# Altium PCB MADI_STM32G4_PCB_L4.PcbDoc (part 1 of 3)
Units mm, origin at the board's own origin, x right, y up, seen from the top; angles counter-clockwise.
Board outline 30 x 21.59 mm, 4 copper layers (L1, L2 (GND), L3 (GND), L4), stack 1.525 mm thick; 52 components, 52 nets, 268 pads, 180 vias.
Unrouted connection lines stored in the file: 135.
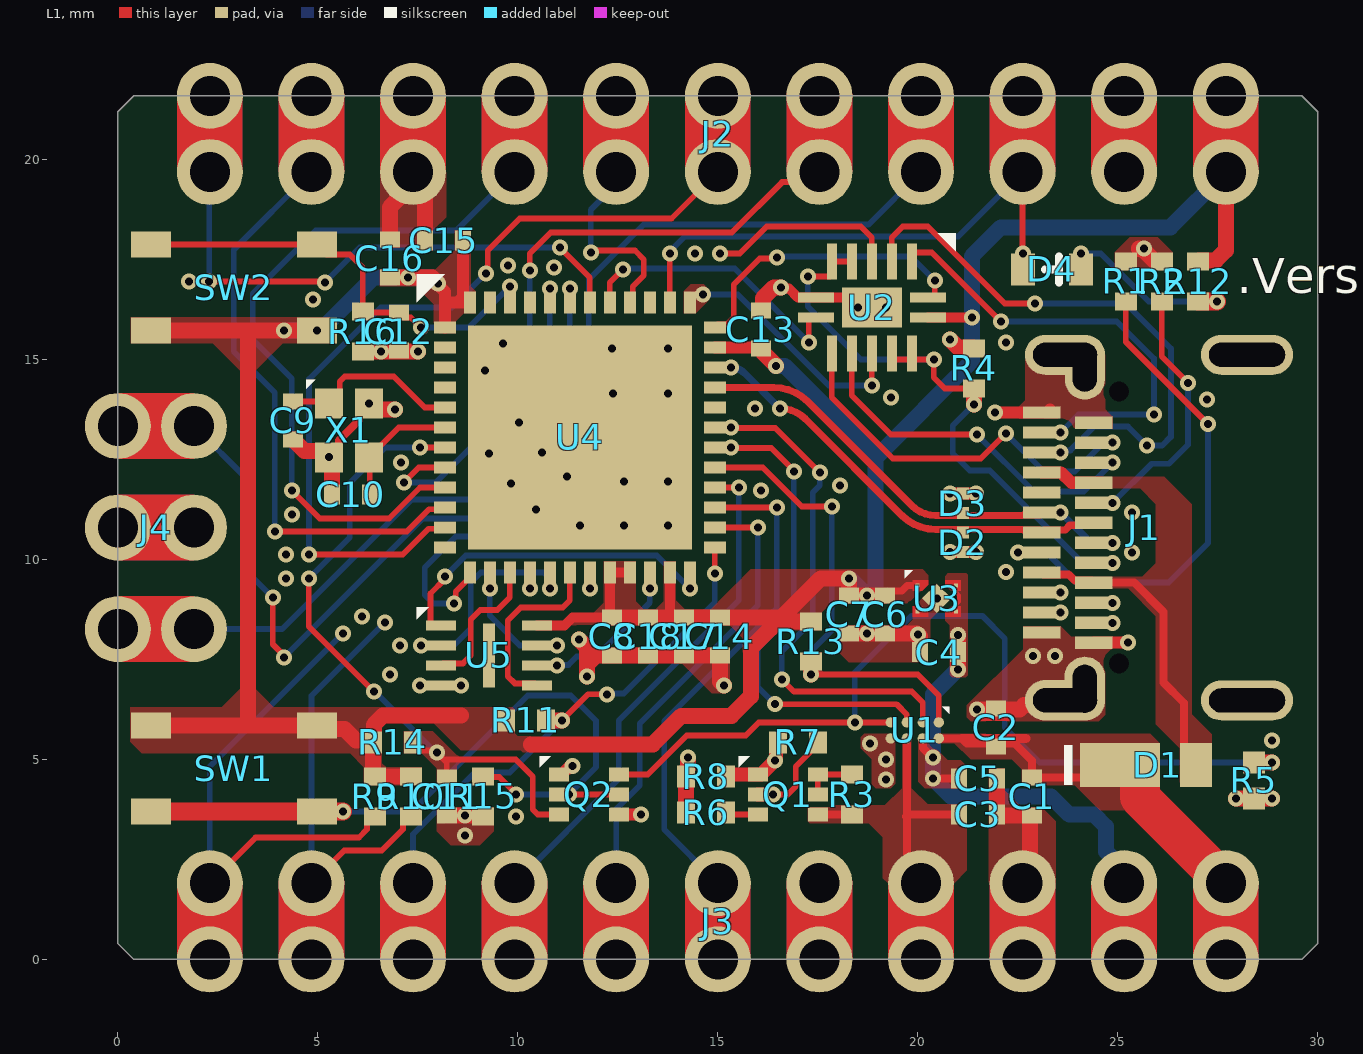
[diagram p0: L1 view]
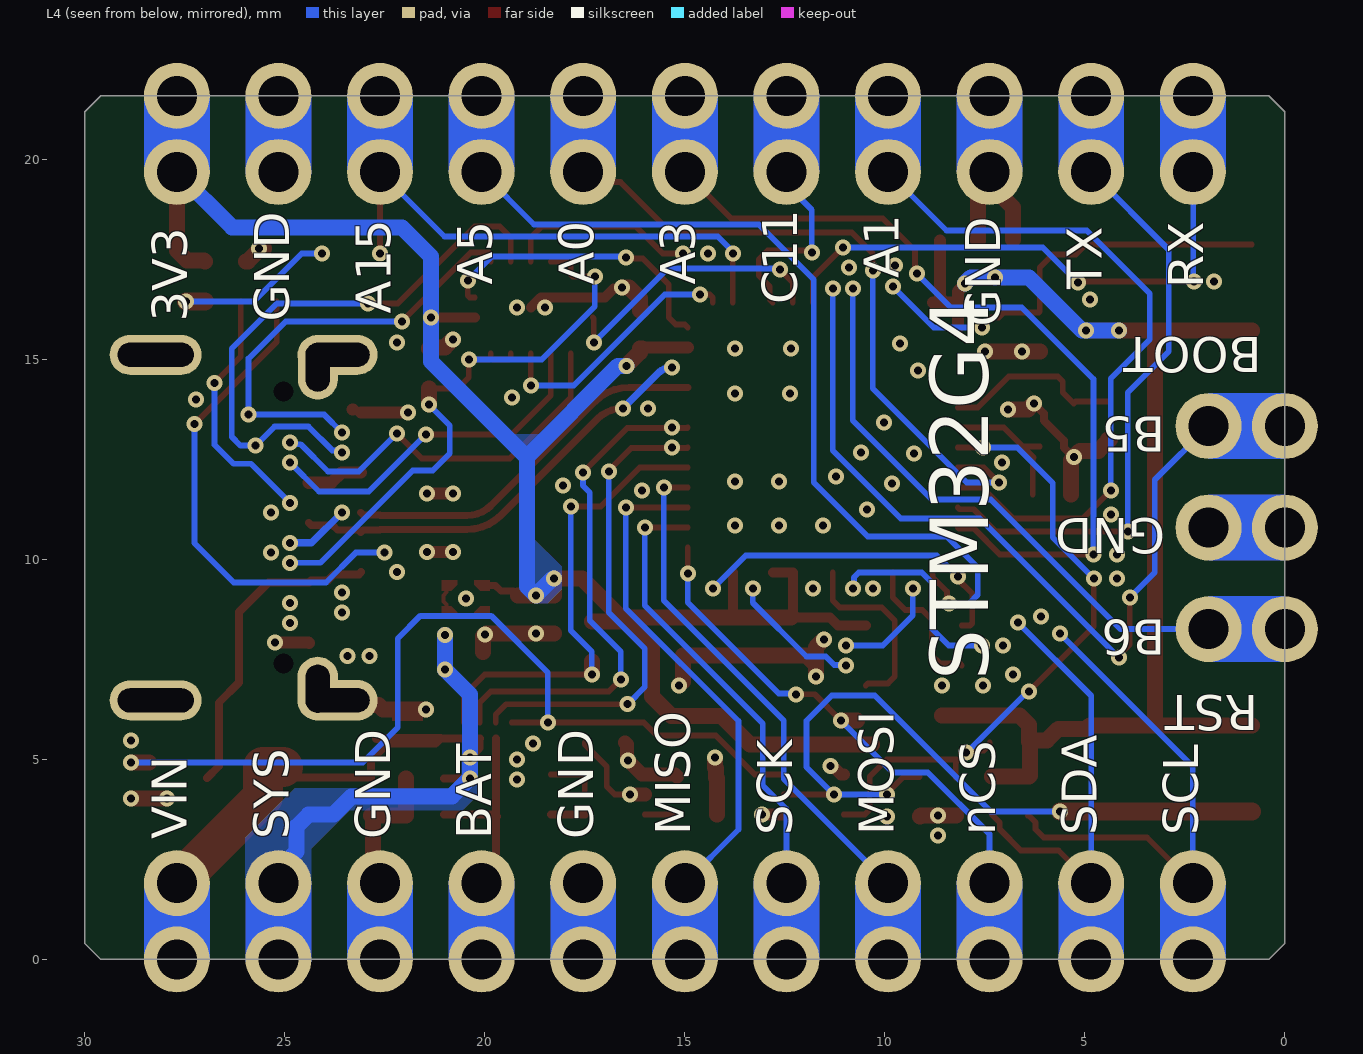
[diagram p1: L4 view, seen from below]
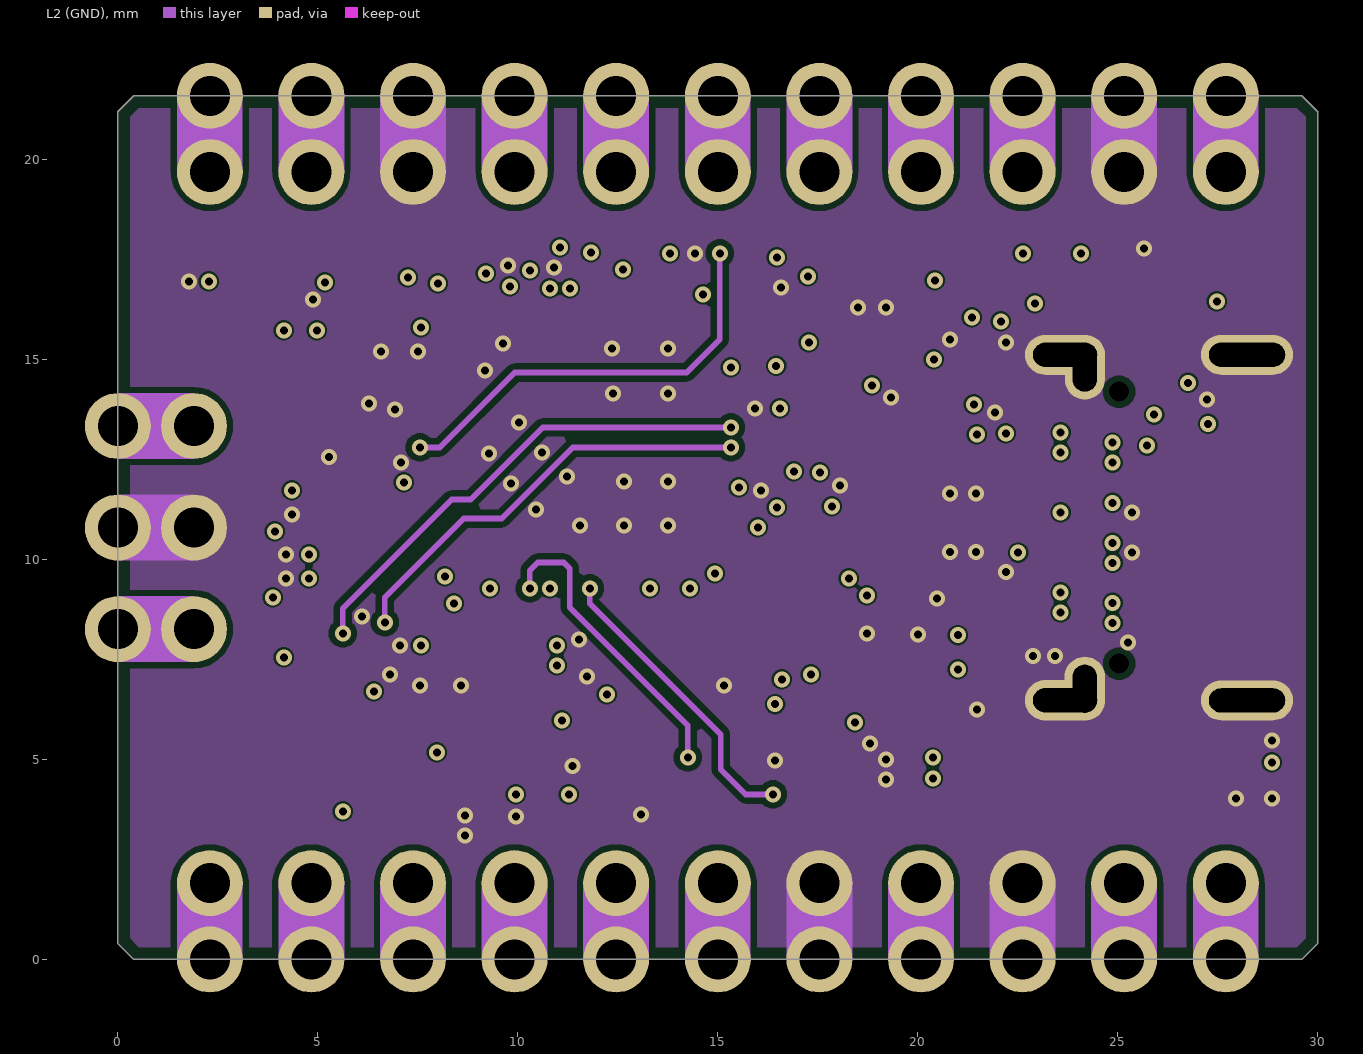
[diagram p2: L2 (GND)]
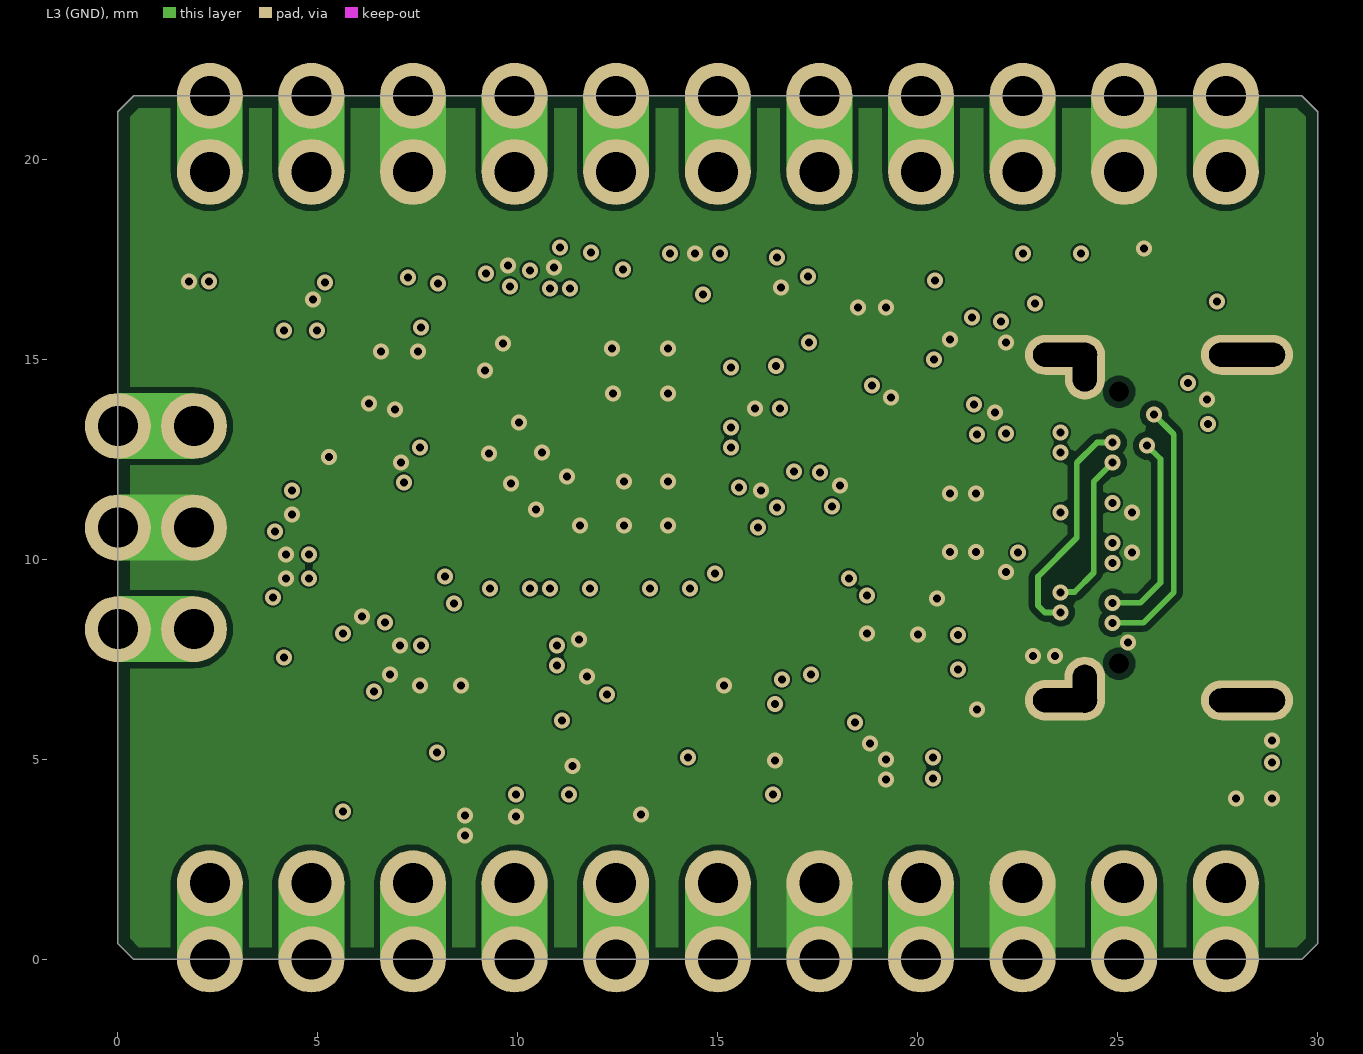
[diagram p3: L3 (GND)]
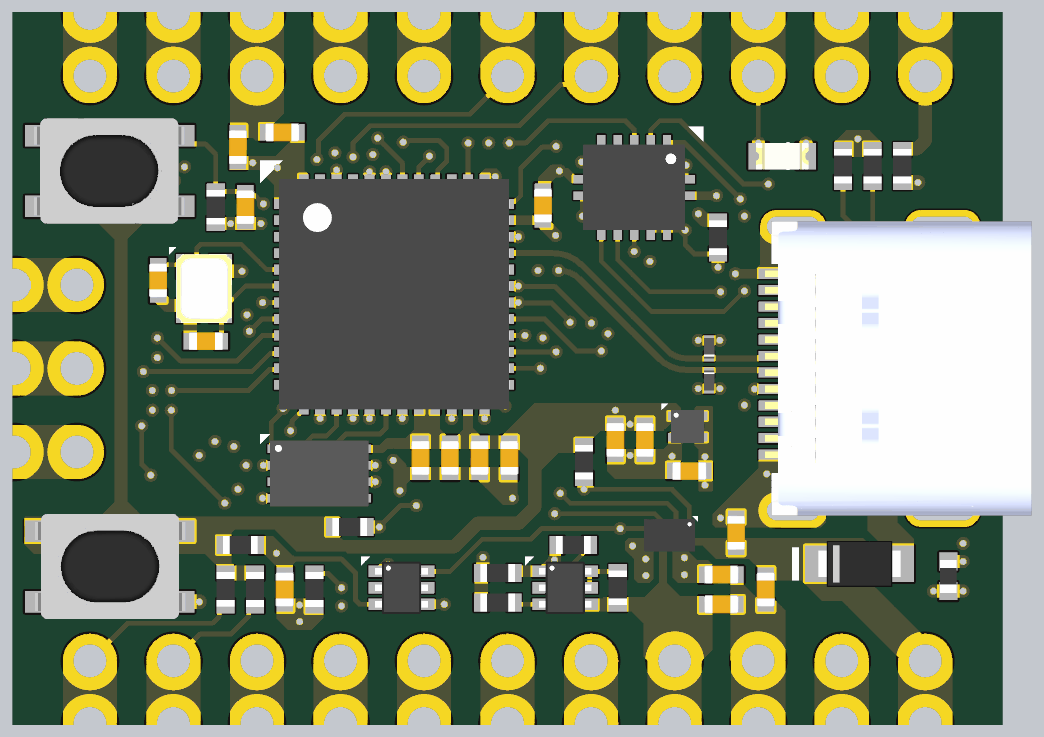
[diagram p5: 3D render of the assembled board from above, using the file's embedded part models]

## Layer stack, top to bottom
Top Solder: solder mask 0.02, Solder Resist, Dk 4.2
L1: signal copper 0.0175
Dielectric 1: prepreg 0.11, ?, Dk 4.5
L2 (GND): signal copper 0.035
Dielectric 2: core 1.2, FR-4, Dk 4.5
L3 (GND): signal copper 0.035
Dielectric 3: prepreg 0.11, ?, Dk 4.5
L4: signal copper 0.0175
Bottom Solder: solder mask 0.02, Solder Resist, Dk 4.2

## Board outline
0,0.4 0.4,0 29.6,0 30,0.4 30,21.19 29.6,21.59 0.4,21.59 0,21.19

## Design rules (kind name [scope] priority, off if disabled: settings)
AcuteAngle [All] p1: minimum=4.49000000000000E+0001 checktracksonly=FALSE
BoardOutlineClearance BoardOutlineClearance_Silk [OnLayer('Top Overlay') or OnLayer('Bottom Overlay')] p1: gap=0 ignorepadtopadclearanceinfootprint=FALSE
BoardOutlineClearance BoardOutlineClearance_EdgeComponents [InComponent('J4') or InComponent('J3') or InComponent('J2')] p2: gap=0 ignorepadtopadclearanceinfootprint=FALSE
BoardOutlineClearance BoardOutlineClearance_Text [IsText] p3: gap=0 ignorepadtopadclearanceinfootprint=FALSE
BoardOutlineClearance [All] p4: gap=0.3 ignorepadtopadclearanceinfootprint=FALSE
Clearance Clearance_Fiducials [InComponentClass('Fiducial') vs InComponentClass('Fiducial')] p1: gap=0 ignorepadtopadclearanceinfootprint=FALSE
Clearance "Clearance_Track and Track" [IsTrack vs IsTrack] p2: gap=0.15 ignorepadtopadclearanceinfootprint=FALSE
Clearance Clearance_NPTH [(InPadClass('NPTH'))] p3: gap=0.2 ignorepadtopadclearanceinfootprint=FALSE
Clearance Clearance_ThruPin [IsThruPin and Not InAnyComponent] p4: gap=0.25 ignorepadtopadclearanceinfootprint=FALSE
Clearance "Clearance_Poly to All" [IsRegion and (not InAnyComponent)] p5: gap=0.15 ignorepadtopadclearanceinfootprint=TRUE
Clearance [All] p6: gap=0.1 ignorepadtopadclearanceinfootprint=FALSE
ComponentClearance ComponentClearance_SW1_SW2 [InComponent('SW1') or InComponent('SW2') vs InComponent('J2') or InComponent('J3')] p1: gap=0 collisioncheckmode=3 verticalgap=0 showdistances=FALSE
ComponentClearance ComponentClearance_U4 [InComponent('U4') vs InComponent('U4')] p2: gap=0 collisioncheckmode=3 verticalgap=0 showdistances=FALSE
ComponentClearance [All] p3: gap=0.1 collisioncheckmode=3 verticalgap=0 showdistances=FALSE
DiffPairsRouting [All] p1: maxlimit=0.17 minlimit=0.1 mostfreqgap=0.17 toplayer_mingap=0.17 toplayer_minwidth=0.18 toplayer_maxwidth=0.18 toplayer_prefwidth=0.18 bottomlayer_mingap=0.17 bottomlayer_minwidth=0.18 bottomlayer_maxwidth=0.18 bottomlayer_prefwidth=0.18 impedanceprofiledriven=TRUE impedanceprofileid={6465BEDB-63ED-48EF-AFED-AA02275A4435} impedanceprofilevalue=90.000000 maxuncoupledlength=12.7
HoleSize [All] p1: absolutevalues=TRUE maxlimit=6.5 minlimit=0.2 maxpercent=80.000 minpercent=20.000
HoleToHoleClearance HoleToHoleClearance_J1 [InComponent('J1') vs InComponent('J1')] p1: gap=0 allowstackedmicrovias=TRUE
HoleToHoleClearance HoleToHoleClearance_1 [All] p2: gap=0.2 allowstackedmicrovias=TRUE
Length [InNetClass('Xtal')] p1: maxlimit=2540 minlimit=0
MinimumAnnularRing MinimumAnnularRing_ThermalPadVias [IsVia and InAnyComponent] p1: minimumring=0.1
MinimumAnnularRing [All] p2: minimumring=0.1
MinimumSolderMaskSliver [All] p1: minsoldermaskwidth=0.03
PlaneClearance [All] p1: clearance=0.2
PlaneConnect "PlaneConnect_GND to PAD" [(InNet('GND') and IsPad)] p1: planeconnectstyle=Relief reliefexpansion=0.3 reliefentries=4 reliefconductorwidth=0.5 reliefairgap=0.2
PlaneConnect [All] p2: planeconnectstyle=Direct reliefexpansion=0.508 reliefentries=4 reliefconductorwidth=0.254 reliefairgap=0.254
PolygonConnect [All] p1: connectstyle=Direct reliefconductorwidth=0.254 reliefentries=4 polygonreliefangle="90 Angle" airgapwidth=0.254
RoutingVias ThermalPadVias [IsVia and InAnyComponent] p1: holewidth=0.2 width=0.45 viastyle="Through Hole" minholewidth=0.2 minwidth=0.4 maxholewidth=0.25 maxwidth=0.5
RoutingVias [All] p2: holewidth=0.3 width=0.6 viastyle="Through Hole" minholewidth=0.2 minwidth=0.4 maxholewidth=0.4 maxwidth=0.8
SMDEntry [All] p1: side=TRUE corner=TRUE anyangle=TRUE
SilkToSilkClearance [All] p1: silktosilkclearance=0
SilkToSolderMaskClearance [IsPad] p1: minsilkscreentomaskgap=0 clearancetoexposedcopper=TRUE
SolderMaskExpansion [All] p1: expansion=0.07 istentingtop=FALSE useseparateexpansions=TRUE expansionbottom=0.07 istentingbottom=FALSE
Width Width_Power [InNet('+*') or InNet('GND')] p1: maxlimit=2.5 minlimit=0.1 preferedwidth=0.4
Width [All] p2: maxlimit=2.5 minlimit=0.1 preferedwidth=0.146 minimp=50.000000 maximp=50.000000 favimp=50.000000
21 further rules are at their usual default settings.

## Classes and differential pairs
differential pair class DIFF90: USB_D
differential pair USB_D: +USB_D_P -USB_D_N

## Components (designator, comment, footprint, x,y, rotation, side; value= is the part's Value field where it differs from the comment)
C1 "4.7uF" CAPC1005X06N 22.85,4.075 r90 top
C2 "100nF" CAPC1005X06N 21.95,5.8 r270 top
C3 "1uF" CAPC1005X06N 21.5,3.625 r180 top
C4 "4.7uF" CAPC1005X06N 20.525,7.68 r0 top
C5 "100nF" CAPC1005X06N 21.5,4.525 r180 top
C6 "100nF" CAPC1005X06N 19.175,8.625 r90 top
C7 "1uF" CAPC1005X06N 18.275,8.625 r90 top
C8 "1uF" CAPC1005X06N 12.35,8.075 r90 top
C9 "8pF" CAPC1005X06N 4.375,13.475 r270 top
C10 "8pF" CAPC1005X06N 5.825,11.625 r180 top
C11 "1uF" CAPC1005X06N 8.225,4.075 r90 top
C12 "100nF" CAPC1005X06N 7.025,15.7 r90 top
C13 "100nF" CAPC1005X06N 16.075,15.75 r270 top
C14 "100nF" CAPC1005X06N 15.05,8.075 r90 top
C15 "100nF" CAPC1005X06N 8.15,17.975 r0 top
C16 "100nF" CAPC1005X06N 6.8,17.525 r270 top
C17 "100nF" CAPC1005X06N 14.15,8.075 r90 top
C18 "100nF" CAPC1005X06N 13.25,8.075 r90 top
D1 "CUHS20F30,H3F" US2H-DIODE 25.7,4.855 r0 top
D2 "TPESD0201G05V" DIOC0603X03N 21.125,10.43 r270 top
D3 "TPESD0201G05V" DIOC0603X03N 21.125,11.405 r90 top
D4 "YLWGREEN" LDIOC1608X08N 23.35,17.25 r180 top
J1 "TYPEC-324G-BCP24" KUSBX-SMT3-CS-BTR_KYC 26.881,10.795 r90 top locked
J2 "Double_Header_1x11_2.54" 1x11_DOUBLE_HEADER_2.54 15,21.59 r180 top
J3 "Double_Header_1x11_2.54" 1x11_DOUBLE_HEADER_2.54 15,1.905 r180 top
J4 "Double_Header_1x3_2.54" 1x3_DOUBLE_HEADER_2.54 1.905,10.795 r90 top
Q1 "EM6M2T2R" SOTFL50P160X55-6N 16.75,4.125 r0 top
Q2 "EM6K7T2R" SOTFL50P160X55-6N 11.775,4.125 r0 top
R1 "5.1K" RESC1005X04N 25.2,16.95 r270 top
R2 "5.1K" RESC1005X04N 26.1,16.95 r270 top
R3 "10K" RESC1005X04N 18.35,4.125 r270 top
R4 "10K" RESC1005X04N 21.4,14.775 r270 top
R5 "10K NTC" NTC1005X05N 28.4,4.475 r90 top value=10kR
R6 "360K" RESC1005X04N 14.7,3.675 r0 top value=360kR
R7 "10K" RESC1005X04N 17,5.425 r0 top
R8 "56K" RESC1005X04N 14.7,4.575 r180 top
R9 "10K" RESC1005X04N 6.428,4.076 r90 top
R10 "10K" RESC1005X04N 7.325,4.075 r90 top
R11 "10K" RESC1005X04N 10.2,5.975 r180 top
R12 "510R" RESC1005X04N 27,16.95 r90 top
R13 "10K" RESC1005X04N 17.325,7.95 r270 top
R14 "10K" RESC1005X04N 6.875,5.425 r180 top
R15 "10K" RESC1005X04N 9.125,4.075 r90 top
R16 "10K" RESC1005X04N 6.125,15.7 r90 top
SW1 "PTS810SJM250SMTRLFS" PTS810 2.9,4.775 r180 top
SW2 "PTS810SJM250SMTRLFS" PTS810 2.9,16.8 r0 top
U1 "BQ25180YBGR" BGA8C40P2X4_100X155X50_YBG0008 19.925,5.725 r270 top
U2 "74LVC4066BQ,115" QFN50P250X300X100_HS-15N 18.85,16.3 r270 top
U3 "NCP167BMX330TBG" NCP167 20.475,9.025 r0 top
U4 "STM32G473CEU6" QFN50P700X700X60_HS-49N 11.55,13.05 r0 top locked
U5 "MX25R1635FZUIL0" USON8_3X2 9.275,7.6 r0 top
X1 "32 MHz" XT2016_ECS 5.775,13.225 r270 top

## Footprints (in the part's own frame and the unit in brackets; to place one, negate y for a bottom-side part, rotate by r counter-clockwise, add the part's x,y. Pads: shape width x height; smd on the part's side, far side on the other; paste and mask are expansions set on the pad)
1x3_DOUBLE_HEADER_2.54 [mm]
  round 1.65 hole 1: 1(-2.54,0) 1(-2.54,1.905) 2(0,1.905) 2(0,0) 3(2.54,0) 3(2.54,1.905)
  Multi-Layer region: 1.717,0 3.365,0 3.365,1.905 1.717,1.905
  Multi-Layer region: -0.823,0 0.825,0 0.825,1.905 -0.823,1.905
  Multi-Layer region: -3.363,0 -1.715,0 -1.715,1.905 -3.363,1.905
1x11_DOUBLE_HEADER_2.54 [mm]
  round 1.65 hole 1: 1(-12.7,0) 1(-12.7,1.905) 2(-10.16,0) 2(-10.16,1.905) 3(-7.62,0) 3(-7.62,1.905) 4(-5.08,0) 4(-5.08,1.905) 5(-2.54,1.905) 5(-2.54,0) 6(0,1.905) 6(0,0) 7(2.54,1.905) 7(2.54,0) 8(5.08,0) 8(5.08,1.905) 9(7.62,0) 9(7.62,1.905) 10(10.16,0) 10(10.16,1.905) 11(12.7,0) 11(12.7,1.905)
  Multi-Layer region: -8.443,-0.063 -6.795,-0.063 -6.795,1.905 -8.443,1.905
  Multi-Layer region: 11.877,-0.063 13.525,-0.063 13.525,1.905 11.877,1.905
  Multi-Layer region: 9.337,-0.063 10.985,-0.063 10.985,1.905 9.337,1.905
  Multi-Layer region: 6.797,-0.063 8.445,-0.063 8.445,1.905 6.797,1.905
  Multi-Layer region: 4.257,-0.063 5.905,-0.063 5.905,1.905 4.257,1.905
  Multi-Layer region: 1.717,-0.063 3.365,-0.063 3.365,1.905 1.717,1.905
  Multi-Layer region: -0.823,-0.063 0.825,-0.063 0.825,1.905 -0.823,1.905
  Multi-Layer region: -3.363,-0.063 -1.715,-0.063 -1.715,1.905 -3.363,1.905
  Multi-Layer region: -5.903,-0.063 -4.255,-0.063 -4.255,1.905 -5.903,1.905
  Multi-Layer region: -10.983,0 -9.335,0 -9.335,1.968 -10.983,1.968
  Multi-Layer region: -13.523,0 -11.875,0 -11.875,1.968 -13.523,1.968
BGA8C40P2X4_100X155X50_YBG0008 [mm] "BGA, 8-Leads, Body 1.00x1.55mmx0.50mm, Pitch 0.40mm"
  round 0.26 smd paste-10 mask+0.05: A1(-0.2,0.6) A2(0.2,0.6) B1(-0.2,0.2) B2(0.2,0.2) C1(-0.2,-0.2) C2(0.2,-0.2) D1(-0.2,-0.6) D2(0.2,-0.6)
  silkscreen extent -0.59,0.69 -0.41,0.86, body extent -0.5,-0.77 0.5,0.77, height 0.5
CAPC1005X06N [mm] "Chip Capacitor, 2-Leads, Body 1.00x0.50mm, IPC Medium Density"
  rect 0.4x0.5 smd mask+0.07: 1(-0.475,0) 2(0.475,0)
  L1 pour cut-out: -0.275,0.25 0.275,0.25 0.275,-0.25 -0.275,-0.25
  body extent -0.53,-0.28 0.53,0.28, height 0.55
DIOC0603X03N [mm] "Chip Diode, 2-Leads, Body 0.62x0.32mm, IPC Medium Density"
  rect 0.3x0.3 smd mask+0.05: 1(-0.245,0) 2(0.245,0)
  body extent -0.31,-0.16 0.31,0.16, height 0.34
KUSBX-SMT3-CS-BTR_KYC [mil]
  round 0 hole 19.68 unplated mask+1.97: 0(-133.86,72.89) 0(133.86,72.89)
  rect 12x37 smd mask+1.97: A1(-103.15,148.87) A2(-83.46,148.87) A3(-63.78,148.87) A4(-44.09,148.87) A5(-24.41,148.87) A6(-4.72,148.87) A7(14.96,148.87) A8(34.65,148.87) A9(54.33,148.87) A10(74.02,148.87) A11(93.7,148.87) A12(113.39,148.87) B1(103.15,97.69) B2(83.47,97.69) B3(63.78,97.69) B4(44.09,97.69) B5(24.41,97.69) B6(4.72,97.69) B7(-14.96,97.69) B8(-34.65,97.69) B9(-54.33,97.69) B10(-74.02,97.69) B11(-93.7,97.69) B12(-113.39,97.69)
  oval 39.37x90.55 hole 23.62 slot 74.8 at 90 deg mask+1.97: S1(-170.08,-53.1) S2(170.08,-53.1)
  oval 40x79 hole 23.62 slot 62.99 at 90 deg mask+1.97: S3(-170,126)
  oval 63x40 hole 23.62 slot 47.24 at 0 deg mask+1.97: S3(-158.5,106.5)
  oval 63x39.37 hole 23.62 slot 47.24 at 0 deg mask+1.97: S4(157.52,106.5)
  oval 39.37x78.74 hole 23.62 slot 62.99 at 90 deg mask+1.97: S4(170,126)
  body extent -176,-159 176,160, height 129
LDIOC1608X08N [mm] "LED, 2-Leads, Body 1.60x0.80mm, IPC Medium Density"
  rect 0.6x0.8 smd mask+0.07: A(-0.725,0) K(0.725,0)
  silkscreen extent -0.18,-0.33 0.18,0.33, body extent -0.8,-0.4 0.8,0.4, height 0.56
NCP167 [mm]
  rect 0.1x0.1 smd paste-1 mask+0: 1(-0.48,0.325) 2(-0.48,-0.325) 3(0.48,-0.325) 4(0.48,0.325)
  rect 0.52x0.52 smd rot 135 paste-1 mask+0.05: 5(0,0)
  L1 region: 0.6,0.195 0.36,0.195 0.21,0.345 0.21,0.455 0.6,0.455
  L1 region: -0.21,0.345 -0.36,0.195 -0.6,0.195 -0.6,0.455 -0.21,0.455
  L1 region: -0.21,-0.345 -0.21,-0.455 -0.6,-0.455 -0.6,-0.195 -0.36,-0.195
  L1 region: 0.6,-0.455 0.21,-0.455 0.21,-0.345 0.36,-0.195 0.6,-0.195
  silkscreen extent -0.8,0.5 -0.6,0.7, body extent -0.5,-0.5 0.5,0.5, height 0.39
NTC1005X05N [mm] "NTC, 2-Leads, Body 1.00x0.50mm, IPC Medium Density"
  rect 0.55x0.55 smd mask+0.07: 1(-0.45,0) 2(0.45,0)
  L1 pour cut-out: -0.175,0.275 0.175,0.275 0.175,-0.275 -0.175,-0.275
  body extent -0.5,-0.25 0.5,0.25, height 0.5
PTS810 [mm]
  rect 1x0.65 smd: 1(-2.075,1.075) 2(2.075,1.075) 3(-2.075,-1.075) 4(2.075,-1.075)
  body extent -2.3,-1.6 2.28,1.6, height 2.51
QFN50P250X300X100_HS-15N [mm] "QFN, 14-Leads, Body 2.50x3.00mm, Pitch 0.50mm, Thermal Pad 1.00x1.50mm, IPC Medium Density"
  rect 0.25x0.9 smd mask+0.05: 1(-0.25,1.4) 7(-0.25,-1.4) 8(0.25,-1.4) 14(0.25,1.4)
  rect 0.9x0.25 smd mask+0.05: 2(-1.15,1) 3(-1.15,0.5) 4(-1.15,0) 5(-1.15,-0.5) 6(-1.15,-1) 9(1.15,-1) 10(1.15,-0.5) 11(1.15,0) 12(1.15,0.5) 13(1.15,1)
  rect 1x1.5 smd mask+0.05: 15(0,0)
  silkscreen extent -1.85,1.65 -1.4,2.1, body extent -1.3,-1.55 1.3,1.55, height 1
QFN50P700X700X60_HS-49N [mm] "QFN, 48-Leads, Body 7.00x7.00mm, Pitch 0.50mm, Thermal Pad 5.60x5.60mm, IPC Medium Density"
  rect 0.55x0.3 smd mask+0.05: 1(-3.375,2.75) 2(-3.375,2.25) 3(-3.375,1.75) 4(-3.375,1.25) 5(-3.375,0.75) 6(-3.375,0.25) 7(-3.375,-0.25) 8(-3.375,-0.75) 9(-3.375,-1.25) 10(-3.375,-1.75) 11(-3.375,-2.25) 12(-3.375,-2.75) 25(3.375,-2.75) 26(3.375,-2.25) 27(3.375,-1.75) 28(3.375,-1.25) 29(3.375,-0.75) 30(3.375,-0.25) 31(3.375,0.25) 32(3.375,0.75) 33(3.375,1.25) 34(3.375,1.75) 35(3.375,2.25) 36(3.375,2.75)
  rect 0.3x0.55 smd mask+0.05: 13(-2.75,-3.375) 14(-2.25,-3.375) 15(-1.75,-3.375) 16(-1.25,-3.375) 17(-0.75,-3.375) 18(-0.25,-3.375) 19(0.25,-3.375) 20(0.75,-3.375) 21(1.25,-3.375) 22(1.75,-3.375) 23(2.25,-3.375) 24(2.75,-3.375) 37(2.75,3.375) 38(2.25,3.375) 39(1.75,3.375) 40(1.25,3.375) 41(0.75,3.375) 42(0.25,3.375) 43(-0.25,3.375) 44(-0.75,3.375) 45(-1.25,3.375) 46(-1.75,3.375) 47(-2.25,3.375) 48(-2.75,3.375)
  rect 5.6x5.6 smd mask+0.05: 49(0,0)
  silkscreen extent -4.08,3.37 -3.38,4.08, body extent -3.5,-3.5 3.5,3.5, height 0.6
RESC1005X04N [mm] "Chip Resistor, 2-Leads, Body 1.00x0.50mm, IPC Medium Density"
  rect 0.45x0.55 smd mask+0.05: 1(-0.5,0) 2(0.5,0)
  L1 pour cut-out: -0.275,0.275 0.275,0.275 0.275,-0.275 -0.275,-0.275
  body extent -0.53,-0.28 0.53,0.28, height 0.35
SOTFL50P160X55-6N [mm] "SOTFL, 6-Leads, Body 1.60x1.60mm, Pitch 0.50mm, IPC Medium Density"
  rect 0.5x0.35 smd mask+0.05: 1(-0.75,0.5) 2(-0.75,0) 3(-0.75,-0.5) 4(0.75,-0.5) 5(0.75,0) 6(0.75,0.5)
  silkscreen extent -1.23,0.67 -0.95,0.95, body extent -0.8,-0.8 0.8,0.8, height 0.55
US2H-DIODE [mm] "SODFL, 2-Leads, Body 1.60x3.50mm, IPC Medium Density"
  rect 2x1.1 smd: 1(-0.65,0)
  rect 0.8x1.1 smd: 2(1.25,0)
  silkscreen extent -2.05,-0.5 -1.84,0.5, body extent -1.25,-0.7 1.25,0.7, height 0.61
USON8_3X2 [mm]
  rect 0.75x0.254 smd mask+0.05: 1(-1.2,0.75) 2(-1.2,0.25) 3(-1.2,-0.25) 4(-1.2,-0.75) 5(1.2,-0.75) 6(1.2,-0.25) 7(1.2,0.25) 8(1.2,0.75)
  rect 0.3x1.6 smd mask+0.05: 9(0,0)
  silkscreen extent -1.8,0.9 -1.5,1.2, body extent -1.5,-1 1.5,1, height 0.61
XT2016_ECS [mm]
  rect 0.75x0.7 smd mask+0.05: 1(-0.675,-0.5) 2(0.675,-0.5) 3(0.675,0.5) 4(-0.675,0.5)
  silkscreen extent -1.26,-1.06 -1.04,-0.84, body extent -1.05,-0.85 1.05,0.85, height 0.56

## Part data
C1 C4: library part CL05A475MP5NRNC, "CAP CER 4.7UF 10V X5R 0402", Case Code (Imperial)=0402, Case Code (Metric)=1005, Dielectric=X5R, Manufacturer=Samsung, Max Operating Temperature=85°C, Min Operating Temperature=-55°C, Package Quantity=10000, Supplier Part Number 1=1276-1482-1-ND, Tolerance=20%, Voltage Rating=10V, Capacitance=4.7uF, Case/Package=0402, Category="Ceramic Capacitors", ComponentLink1Description=https://datasheet.ciiva.com/25786/cl05a475mp5nrnc-25786963.pdf?src-supplier=Digi-Key, ComponentLink1URL=https://datasheet.ciiva.com/25786/cl05a475mp5nrnc-25786963.pdf?src-supplier=Digi-Key, ComponentLink2Description=https://datasheet.ciiva.com/16437/cl05b104kq5nnnc-16437353.pdf?src-supplier=Future+Electronics, ComponentLink2URL=https://datasheet.ciiva.com/16437/cl05b104kq5nnnc-16437353.pdf?src-supplier=Future+Electronics, Lead Free="Lead Free", Length=0.039inch, Manufacturer Part Number=CL05A475MP5NRNC, Mount="Surface Mount", Packaging="Tape and Reel", Pricing 1="1=0.10000, 10=0.06800, 50=0.03680, 100=0.03010, 500=0.02150, 1000=0.01689, 2500=0.01535, 5000=0.01412 (USD)", RoHS=Yes, RoHS Compliant=Yes, Series=CL, Stock 1=6997940, Supplier 1=Digi-Key, Thickness=0.022inch, Width=0.02inch
C2 C5 C6 C12 C13 C14 C15 C16 C17 C18: library part GRM155R71H104KE14D, "CAP CER 0.1UF 50V X7R 0402", Case Code (Imperial)=0402, Case Code (Metric)=1005, Dielectric=X7R, Dielectric Material=Ceramic, Manufacturer=Murata, Max Operating Temperature=125°C, Min Operating Temperature=-55°C, Package Quantity=10000, Supplier Part Number 1=490-10700-1-ND, Tolerance=10%, Voltage=50V, Capacitance=100nF, Case/Package=0402, Category="Ceramic Capacitors", ComponentLink1Description=http://www.mouser.com/ds/2/281/c02e-2905.pdf?src-supplier=Mouser, ComponentLink1URL=http://www.mouser.com/ds/2/281/c02e-2905.pdf?src-supplier=Mouser, ComponentLink2Description=http://www.farnell.com/datasheets/2079156.pdf?src-supplier=Farnell, ComponentLink2URL=http://www.farnell.com/datasheets/2079156.pdf?src-supplier=Farnell, ComponentLink3Description=http://components.arrow.com/part/dataview/0323_07030614?src-supplier=Arrow+Europe, ComponentLink3URL=http://components.arrow.com/part/dataview/0323_07030614?src-supplier=Arrow+Europe, ComponentLink4Description=http://psearch.en.murata.com/capacitor/product/GRM155R71H104KE14%23.pdf?src-supplier=Avnet, ComponentLink4URL=http://psearch.en.murata.com/capacitor/product/GRM155R71H104KE14%23.pdf?src-supplier=Avnet, ComponentLink5Description=https://search.murata.co.jp/Ceramy/image/img/A01X/G101/ENG/GRM155R71H104KE14-01.pdf?src-supplier=Digi-Key, ComponentLink5URL=https://search.murata.co.jp/Ceramy/image/img/A01X/G101/ENG/GRM155R71H104KE14-01.pdf?src-supplier=Digi-Key, ComponentLink6Description=http://www.farnell.com/datasheets/2079156.pdf?src-supplier=Newark, ComponentLink6URL=http://www.farnell.com/datasheets/2079156.pdf?src-supplier=Newark, ComponentLink7Description=http://www.farnell.com/datasheets/2079156.pdf?src-supplier=Element14, ComponentLink7URL=http://www.farnell.com/datasheets/2079156.pdf?src-supplier=Element14, Depth=0.5mm, Dissipation Factor=0.025%, Height=0.5mm, Lead Free="Lead Free", Length=1mm, Manufacturer Part Number=GRM155R71H104KE14D, Material=Ceramic, Mount="Surface Mount", Packaging="Tape and Reel", Pricing 1="1=0.10000, 10=0.03400, 50=0.01860, 100=0.01520, 500=0.01086, 1000=0.00854, 2500=0.00776, 5000=0.00714 (USD)", REACH SVHC="No SVHC", Resistor Type=Ceramic, RoHS=Yes, RoHS Compliant=Yes, Stock 1=23318607, Supplier 1=Digi-Key, Termination=SMD/SMT, Thickness=0.022inch, Voltage Rating=50V, Voltage Rating (DC)=50V, Weight=0.000212oz, Width=0.5mm
C3 C7 C8 C11: library part CL05A105KO5NNNC, "CAP CER 1UF 16V X5R 0402", Case Code (Imperial)=0402, Case Code (Metric)=1005, Dielectric=X5R, Manufacturer=Samsung, Max Operating Temperature=85°C, Min Operating Temperature=-55°C, Package Quantity=1, Supplier Part Number 1=1276-1067-1-ND, Tolerance=10%, Voltage=16V, Capacitance=1uF, Case/Package=0402, Category="Ceramic Capacitors", ComponentLink1Description=https://datasheet.ciiva.com/16207/cl05a105ko5nnnc-16207571.pdf?src-supplier=Future+Electronics, ComponentLink1URL=https://datasheet.ciiva.com/16207/cl05a105ko5nnnc-16207571.pdf?src-supplier=Future+Electronics, ComponentLink2Description=https://datasheet.ciiva.com/15195/getdatasheetpartid-355272-15195629.pdf?src-supplier=Verical, ComponentLink2URL=https://datasheet.ciiva.com/15195/getdatasheetpartid-355272-15195629.pdf?src-supplier=Verical, Contact Plating=Tin, Depth=0.5mm, Height=0.5mm, Length=1mm, Manufacturer Part Number=CL05A105KO5NNNC, Mount="Surface Mount", Packaging="Tape and Reel", Pricing 1="1=0.10000, 10=0.04400, 50=0.02400, 100=0.01960, 500=0.01402, 1000=0.01101, 2500=0.01001, 5000=0.00921 (USD)", Radiation Hardening=No, RoHS=Yes, Stock 1=2455652, Supplier 1=Digi-Key, Thickness=0.022inch, Voltage Rating=16V, Width=0.02inch
C9 C10: library part GRM1555C1H8R0DA01D, "CAP CER 8PF 50V C0G/NP0 0402", Case Code (Imperial)=0402, Case Code (Metric)=1005, Dielectric=C0G, Manufacturer=Murata, Max Operating Temperature=125°C, Min Operating Temperature=-55°C, Package Quantity=1, Supplier Part Number 1=490-5867-1-ND, Temperature Coefficient=30ppm/°C, Voltage=50V, Capacitance=8pF, Case/Package=0402, Category="Ceramic Capacitors", ComponentLink1Description=https://datasheet.ciiva.com/5420/product-5420945.pdf?src-supplier=Mouser, ComponentLink1URL=https://datasheet.ciiva.com/5420/product-5420945.pdf?src-supplier=Mouser, ComponentLink2Description=https://datasheet.ciiva.com/18184/getdatasheetpartid-713257-18184503.pdf?src-supplier=Verical, ComponentLink2URL=https://datasheet.ciiva.com/18184/getdatasheetpartid-713257-18184503.pdf?src-supplier=Verical, ComponentLink3Description=https://datasheet.ciiva.com/6277/partnumbering-e-01-6277815.pdf?src-supplier=Digi-Key, ComponentLink3URL=https://datasheet.ciiva.com/6277/partnumbering-e-01-6277815.pdf?src-supplier=Digi-Key, ComponentLink4Description=https://datasheet.ciiva.com/6277/partnumbering-e-01-6277814.pdf?src-supplier=Digi-Key, ComponentLink4URL=https://datasheet.ciiva.com/6277/partnumbering-e-01-6277814.pdf?src-supplier=Digi-Key, ComponentLink5Description=https://datasheet.ciiva.com/6277/partnumbering-e-01-6277816.pdf?src-supplier=Digi-Key, ComponentLink5URL=https://datasheet.ciiva.com/6277/partnumbering-e-01-6277816.pdf?src-supplier=Digi-Key, ComponentLink6Description=https://datasheet.ciiva.com/11463/product-11463855.pdf?src-supplier=Avnet, ComponentLink6URL=https://datasheet.ciiva.com/11463/product-11463855.pdf?src-supplier=Avnet, Construction=Flat, Depth=0.5mm, Height=0.5mm, Lead Free="Lead Free", Length=1mm, Manufacturer Part Number=GRM1555C1H8R0DA01D, Material=Ceramic, Mount="Surface Mount", Packaging="Tape and Reel", Pricing 1="1=0.10000, 10=0.03400, 50=0.01840, 100=0.01510, 500=0.01078, 1000=0.00847, 2500=0.00770, 5000=0.00708 (USD)", Radiation Hardening=No, Reach SVHC Compliant=Yes, RoHS=Yes, RoHS Compliant=Yes, Series=GRM, Stock 1=709625, Supplier 1=Digi-Key, Termination=SMD/SMT, Thickness=0.022inch, Voltage Rating=50V, Voltage Rating (DC)=50V, Width=0.5mm
D1: "DIODE SCHOTTKY 30V 2A US2H", Manufacturer=Toshiba, Supplier Part Number 1=CUHS20F30H3FCT-ND, Manufacturer Part Number=CUHS20F30,H3F, Pricing 1="1=0.37000, 10=0.30200, 100=0.20540, 500=0.15408, 1000=0.11556 (USD)", RoHS=No, Stock 1=70970, Supplier 1=Digi-Key
D2 D3: "TVS DIODE 5.5VWM 40VC 0201", Case/Package=SMD/SMT, Clamping Voltage=40V, Manufacturer="TECH PUBLIC", Max Operating Temperature=125°C, Min Operating Temperature=-55°C, Peak Pulse Current=3A, Power Line Protection=No, Resistor Type=Zener, Reverse Standoff Voltage=5.5V, Category=Diodes, ComponentLink1Description=https://datasheet.lcsc.com/lcsc/2005211235_TECH-PUBLIC-TPESD0201G15V_C558460.pdf, ComponentLink1URL=https://datasheet.lcsc.com/lcsc/2005211235_TECH-PUBLIC-TPESD0201G15V_C558460.pdf, Halogen Free="Halogen Free", Lead Free="Lead Free", Manufacturer Part Number=TPESD0201G05V, Mount="Surface Mount", Number of Bidirectional Channels=1, Packaging="Tape and Reel", RoHS=Yes, RoHS Compliant=Yes
D4: library part 19-217/G7C-AN1P2/3T, "LED YLW/GREEN DIFFUSED 1608 SMD", Color=Green,Yellow, Forward Voltage=2V, Manufacturer=Everlight, Supplier Part Number 1=5203-19-217/G7C-AN1P2/3T, Category=LEDs, ComponentLink1Description=https://datasheet.ciiva.com/48679/19-217-g7c-an1p2-3t-48679179.pdf?src-supplier=Avnet, ComponentLink1URL=https://datasheet.ciiva.com/48679/19-217-g7c-an1p2-3t-48679179.pdf?src-supplier=Avnet, Lead Free="Lead Free", Lens Style=Clear,Diffused,Colorless,Rectangular, Manufacturer Part Number=19-217/G7C-AN1P2/3T, Mounting Technology="Surface Mount", Number of LEDs=1, Pins=2, Pricing 1="2635=0.01900, 6250=0.01600, 10000=0.01500, 13335=0.01500, 17860=0.01400, 23080=0.01300 (USD)", RoHS=Yes, RoHS Compliant=Yes, Stock 1=152500, Supplier 1="Win Source Electronics", Viewing Angle=120°
J1: "CONN RCPT USB TYPE C, SMT PINS, TH SHIELD", Manufacturer=XUNPU, Category="USB Connectors", ComponentLink1Description=https://www.lcsc.com/product-detail/USB-Connectors_XUNPU-TYPEC-324G-BCP24_C920230.html, ComponentLink1URL=https://www.lcsc.com/product-detail/USB-Connectors_XUNPU-TYPEC-324G-BCP24_C920230.html, Manufacturer Part Number=TYPEC-324G-BCP24
Q1: "MOSFET N/P-CH 20V 0.2A EMT6", Case/Package=SOT-23-5, Continuous Drain Current (ID)=200mA, Drain to Source Resistance=1R, Drain to Source Voltage (Vdss)=20V, Input Capacitance=25pF, Manufacturer=Rohm, Max Operating Temperature=150°C, Max Power Dissipation=150mW, Min Operating Temperature=-55°C, Package Quantity=1, Supplier Part Number 1=EM6M2T2RCT-ND, Category=MOSFETs, ComponentLink1Description=https://datasheet.ciiva.com/6387/em6m2-6387413.pdf?src-supplier=Digi-Key, ComponentLink1URL=https://datasheet.ciiva.com/6387/em6m2-6387413.pdf?src-supplier=Digi-Key, ComponentLink2Description=https://datasheet.ciiva.com/6387/em6m2-6387415.pdf?src-supplier=Digi-Key, ComponentLink2URL=https://datasheet.ciiva.com/6387/em6m2-6387415.pdf?src-supplier=Digi-Key, ComponentLink3Description=https://datasheet.ciiva.com/6387/em6m2-6387417.pdf?src-supplier=Digi-Key, ComponentLink3URL=https://datasheet.ciiva.com/6387/em6m2-6387417.pdf?src-supplier=Digi-Key, Drain-source On Resistance-Max=1R, FET Type="N and P-Channel", Lead Free="Lead Free", Manufacturer Part Number=EM6M2T2R, Mounting Technology="Surface Mount", Packaging="Tape and Reel", Pins=6, Pricing 1="1=0.58000, 10=0.49600, 100=0.37030, 500=0.29096, 1000=0.22482, 2000=0.20499 (USD)", Radiation Hardening=No, Rds On Max=1R, RoHS=Yes, RoHS Compliant=Yes, Stock 1=90900, Supplier 1=Digi-Key
Q2: "MOSFET 2N-CH 20V 0.2A EMT6", Continuous Drain Current (ID)=200mA, Drain to Source Resistance=1.2R, Drain to Source Voltage (Vdss)=20V, Gate to Source Voltage (Vgs)=8V, Input Capacitance=25pF, Manufacturer=Rohm, Max Operating Temperature=150°C, Max Power Dissipation=150mW, Min Operating Temperature=-55°C, Package Quantity=8000, Supplier Part Number 1=EM6K7T2RCT-ND, Category=MOSFETs, ComponentLink1Description=https://datasheet.ciiva.com/6387/em6k7-6387446.pdf?src-supplier=Digi-Key, ComponentLink1URL=https://datasheet.ciiva.com/6387/em6k7-6387446.pdf?src-supplier=Digi-Key, ComponentLink2Description=https://datasheet.ciiva.com/13051/em6k7-209726-13051863.pdf?src-supplier=Mouser, ComponentLink2URL=https://datasheet.ciiva.com/13051/em6k7-209726-13051863.pdf?src-supplier=Mouser, ComponentLink3Description=https://datasheet.ciiva.com/11162/em6k7-11162107.pdf?src-supplier=Avnet, ComponentLink3URL=https://datasheet.ciiva.com/11162/em6k7-11162107.pdf?src-supplier=Avnet, ComponentLink4Description=https://datasheet.ciiva.com/6387/em6k7-6387451.pdf?src-supplier=Digi-Key, ComponentLink4URL=https://datasheet.ciiva.com/6387/em6k7-6387451.pdf?src-supplier=Digi-Key, ComponentLink5Description=https://datasheet.ciiva.com/16437/em6k7-16437677.pdf?src-supplier=Future+Electronics, ComponentLink5URL=https://datasheet.ciiva.com/16437/em6k7-16437677.pdf?src-supplier=Future+Electronics, Drain-source On Resistance-Max=1.2R, Fall Time=10ns, FET Type="2 N-Channel", Lead Free="Lead Free", Manufacturer Part Number=EM6K7T2R, Mounting Technology="Surface Mount", Packaging="Tape and Reel", Pins=6, Pricing 1="1=0.54000, 10=0.43900, 100=0.29900, 500=0.22428, 1000=0.16821, 2000=0.15419 (USD)", Radiation Hardening=No, Rds On Max=1.2R, Rise Time=10ns, RoHS=Yes, RoHS Compliant=Yes, Stock 1=15154, Supplier 1=Digi-Key, Turn-Off Delay Time=15ns, Turn-On Delay Time=5ns
R1 R2: library part RC0402FR-075K1L, "RES SMD 5.1K OHM 1% 1/16W 0402", Case Code (Imperial)=0402, Case Code (Metric)=1005, Manufacturer=Yageo, Max Operating Temperature=155°C, Max Power Dissipation=63mW, Min Operating Temperature=-55°C, Package Quantity=1, Resistance=5.1kR, Resistance Tolerance=1%, Resistor Type="Thick Film", Supplier Part Number 1=311-5.10KLRCT-ND, Temperature Coefficient=100ppm/°C, Voltage Rating=50V, Case/Package=0402, Category="Chip SMD Resistors", ComponentLink1Description=https://datasheet.ciiva.com/2453/pyu-r-int-thick-7-2453400.pdf?src-supplier=Digi-Key, ComponentLink1URL=https://datasheet.ciiva.com/2453/pyu-r-int-thick-7-2453400.pdf?src-supplier=Digi-Key, ComponentLink2Description=https://datasheet.ciiva.com/2453/pyu-r-int-thick-7-2453401.pdf?src-supplier=Digi-Key, ComponentLink2URL=https://datasheet.ciiva.com/2453/pyu-r-int-thick-7-2453401.pdf?src-supplier=Digi-Key, ComponentLink3Description=https://datasheet.ciiva.com/2453/pyu-r-int-thick-7-2453402.pdf?src-supplier=Digi-Key, ComponentLink3URL=https://datasheet.ciiva.com/2453/pyu-r-int-thick-7-2453402.pdf?src-supplier=Digi-Key, ComponentLink4Description=https://datasheet.ciiva.com/12558/pyu-rc0402-51-rohs-l-6-r-8721-12558460.pdf?src-supplier=Mouser, ComponentLink4URL=https://datasheet.ciiva.com/12558/pyu-rc0402-51-rohs-l-6-r-8721-12558460.pdf?src-supplier=Mouser, ComponentLink5Description=https://datasheet.ciiva.com/16744/pyu-rc0402-51-rohs-l-6-r-16744283.pdf?src-supplier=Future+Electronics, ComponentLink5URL=https://datasheet.ciiva.com/16744/pyu-rc0402-51-rohs-l-6-r-16744283.pdf?src-supplier=Future+Electronics, ComponentLink6Description=https://datasheet.ciiva.com/15189/getdatasheetpartid-323636-15189493.pdf?src-supplier=Verical, ComponentLink6URL=https://datasheet.ciiva.com/15189/getdatasheetpartid-323636-15189493.pdf?src-supplier=Verical, ComponentLink7Description=https://datasheet.ciiva.com/7983/1018594-7983519.pdf?src-supplier=Element14, ComponentLink7URL=https://datasheet.ciiva.com/7983/1018594-7983519.pdf?src-supplier=Element14, ComponentLink8Description=https://datasheet.ciiva.com/46394/1018594-46394936.pdf?src-supplier=Element14, ComponentLink8URL=https://datasheet.ciiva.com/46394/1018594-46394936.pdf?src-supplier=Element14, Construction=Rectangular, Depth=0.5mm, Features="Moisture Resistant", Height=0.016inch, Lead Free="Lead Free", Length=1mm, Manufacturer Part Number=RC0402FR-075K1L, Military Standard=Not, Number of Terminations=2, Packaging="Tape and Reel", Power Rating=63mW, Pricing 1="1=0.10000, 10=0.01600, 100=0.00660, 1000=0.00299, 2500=0.00259, 5000=0.00214 (USD)", REACH SVHC=Unknown, RoHS=Yes, RoHS Compliant=Yes, Series=RC, Stock 1=1329359, Supplier 1=Digi-Key, Technology="THICK FILM", Termination=SMD/SMT, Tolerance=1%, Voltage Rating (DC)=50V, Width=0.02inch, Working Voltage=50V
R3 R4 R7 R9 R10 R11 R13 R14 R15 R16: library part RC0402FR-0710KL, "RES SMD 10K OHM 1% 1/16W 0402", Case Code (Imperial)=0402, Case Code (Metric)=1005, Manufacturer=Yageo, Max Operating Temperature=155°C, Max Power Dissipation=63mW, Min Operating Temperature=-55°C, Power Rating=62.5mW, Resistance=10kR, Resistance Tolerance=1%, Resistor Type="Thick Film", Supplier Part Number 1=311-10.0KLRCT-ND, Temperature Coefficient=100ppm/°C, Voltage Rating=50V, Case/Package=0402, Category="Chip SMD Resistors", ComponentLink1Description=https://datasheet.ciiva.com/7660/38568-7660787.pdf?src-supplier=Element14, ComponentLink1URL=https://datasheet.ciiva.com/7660/38568-7660787.pdf?src-supplier=Element14, ComponentLink2Description=https://datasheet.ciiva.com/7983/1018594-7983486.pdf?src-supplier=Element14, ComponentLink2URL=https://datasheet.ciiva.com/7983/1018594-7983486.pdf?src-supplier=Element14, ComponentLink3Description=https://datasheet.ciiva.com/7849/1784430-7849813.pdf?src-supplier=Element14, ComponentLink3URL=https://datasheet.ciiva.com/7849/1784430-7849813.pdf?src-supplier=Element14, ComponentLink4Description=https://datasheet.ciiva.com/7849/1686128-7849814.pdf?src-supplier=Element14, ComponentLink4URL=https://datasheet.ciiva.com/7849/1686128-7849814.pdf?src-supplier=Element14, ComponentLink5Description=https://datasheet.ciiva.com/7849/1784430-7849815.pdf?src-supplier=Element14, ComponentLink5URL=https://datasheet.ciiva.com/7849/1784430-7849815.pdf?src-supplier=Element14, ComponentLink6Description=https://datasheet.ciiva.com/22747/1018594-22747512.pdf?src-supplier=Element14, ComponentLink6URL=https://datasheet.ciiva.com/22747/1018594-22747512.pdf?src-supplier=Element14, ComponentLink7Description=https://datasheet.ciiva.com/12667/pyu-rc0402-51-rohs-l-6-r-12667067.pdf?src-supplier=Mouser, ComponentLink7URL=https://datasheet.ciiva.com/12667/pyu-rc0402-51-rohs-l-6-r-12667067.pdf?src-supplier=Mouser, Construction=Rectangular, Depth=0.5mm, Features="Moisture Resistant", Height=0.32mm, Lead Free="Lead Free", Lead Pitch=0.2mm, Length=1mm, Manufacturer Part Number=RC0402FR-0710KL, Military Standard=Not, Number of Pins=2, Number of Terminations=2, Packaging="Tape and Reel", Pricing 1="1=0.10000, 10=0.01400, 100=0.00580, 1000=0.00260, 2500=0.00226, 5000=0.00186 (USD)", REACH SVHC="No SVHC", RoHS=Yes, RoHS Compliant=Yes, Series=RC, Stock 1=39209283, Supplier 1=Digi-Key, Termination=SMD/SMT, Tolerance=1%, Voltage Rating (DC)=50V, Width=0.5mm, Working Voltage=50V
R5: library part NCP15XH103F03RC, "THERMISTOR NTC 10KOHM 3380K 0402", Case Code (Imperial)=0402, Case Code (Metric)=1005, Current Rating=310uA, Manufacturer=Murata, Max Operating Temperature=125°C, Max Power Dissipation=100mW, Min Operating Temperature=-40°C, Package Quantity=1, Resistance Tolerance=1%, Supplier Part Number 1=490-4801-1-ND, Case/Package=0402, Category=Thermistors, ComponentLink1Description=https://datasheet.ciiva.com/2848/r44e-2848224.pdf?src-supplier=Digi-Key, ComponentLink1URL=https://datasheet.ciiva.com/2848/r44e-2848224.pdf?src-supplier=Digi-Key, ComponentLink2Description=https://datasheet.ciiva.com/2848/r44e-2848223.pdf?src-supplier=Digi-Key, ComponentLink2URL=https://datasheet.ciiva.com/2848/r44e-2848223.pdf?src-supplier=Digi-Key, ComponentLink3Description=https://datasheet.ciiva.com/2848/r44e-2848225.pdf?src-supplier=Digi-Key, ComponentLink3URL=https://datasheet.ciiva.com/2848/r44e-2848225.pdf?src-supplier=Digi-Key, ComponentLink4Description=https://datasheet.ciiva.com/3280/l0770e-3280495.pdf?src-supplier=Avnet, ComponentLink4URL=https://datasheet.ciiva.com/3280/l0770e-3280495.pdf?src-supplier=Avnet, ComponentLink5Description=https://datasheet.ciiva.com/16208/ncp15wb473j03rc-16208150.pdf?src-supplier=Future+Electronics, ComponentLink5URL=https://datasheet.ciiva.com/16208/ncp15wb473j03rc-16208150.pdf?src-supplier=Future+Electronics, Depth=0.5mm, Height=0.5mm, Lead Free="Lead Free", Length=1mm, Manufacturer Part Number=NCP15XH103F03RC, Mounting Technology="Surface Mount", Packaging="Tape and Reel", Pins=2, Power Rating=100mW, Pricing 1="1=0.14000, 5=0.13000, 10=0.11600, 25=0.10360, 50=0.09120, 100=0.07770, 500=0.06428, 1000=0.05381, 5000=0.04783 (USD)", Radiation Hardening=No, Reach SVHC Compliant=Yes, RoHS=Yes, RoHS Compliant=Yes, Series=NCP, Stock 1=408773, Supplier 1=Digi-Key, Termination=SMD/SMT, Tolerance=1%
R6: library part RC0402FR-07360KL, "RES SMD 360K OHM 1% 1/16W 0402", Case Code (Imperial)=0402, Case Code (Metric)=1005, Manufacturer=Yageo, Max Operating Temperature=155°C, Max Power Dissipation=63mW, Min Operating Temperature=-55°C, Package Quantity=1, Power Rating=62.5mW, Resistance Tolerance=1%, Resistor Type="Thick Film", Supplier Part Number 1=311-360KLRCT-ND, Temperature Coefficient=100ppm/°C, Voltage Rating=50V, Case/Package=0402, Category="Chip SMD Resistors", ComponentLink1Description=https://datasheet.ciiva.com/2453/pyu-r-int-thick-7-2453620.pdf?src-supplier=Digi-Key, ComponentLink1URL=https://datasheet.ciiva.com/2453/pyu-r-int-thick-7-2453620.pdf?src-supplier=Digi-Key, ComponentLink2Description=https://datasheet.ciiva.com/2453/pyu-r-int-thick-7-2453621.pdf?src-supplier=Digi-Key, ComponentLink2URL=https://datasheet.ciiva.com/2453/pyu-r-int-thick-7-2453621.pdf?src-supplier=Digi-Key, ComponentLink3Description=https://datasheet.ciiva.com/2453/pyu-r-int-thick-7-2453619.pdf?src-supplier=Digi-Key, ComponentLink3URL=https://datasheet.ciiva.com/2453/pyu-r-int-thick-7-2453619.pdf?src-supplier=Digi-Key, ComponentLink4Description=https://datasheet.ciiva.com/12561/pyu-rc0402-51-rohs-l-6-r-8721-12561150.pdf?src-supplier=Mouser, ComponentLink4URL=https://datasheet.ciiva.com/12561/pyu-rc0402-51-rohs-l-6-r-8721-12561150.pdf?src-supplier=Mouser, ComponentLink5Description=https://datasheet.ciiva.com/8886/pyu-rc0402-51-rohs-l-6-8886029.pdf?src-supplier=Avnet, ComponentLink5URL=https://datasheet.ciiva.com/8886/pyu-rc0402-51-rohs-l-6-8886029.pdf?src-supplier=Avnet, ComponentLink6Description=https://datasheet.ciiva.com/16742/pyu-rc0402-51-rohs-l-6-r-16742217.pdf?src-supplier=Future+Electronics, ComponentLink6URL=https://datasheet.ciiva.com/16742/pyu-rc0402-51-rohs-l-6-r-16742217.pdf?src-supplier=Future+Electronics, Construction=Rectangular, Contact Plating=Tin,Matte, Depth=0.5mm, Features="Moisture Resistant", Height=0.016inch, Lead Free="Lead Free", Length=1mm, Manufacturer Part Number=RC0402FR-07360KL, Military Standard=Not, Number of Terminations=2, Packaging="Tape and Reel", Pricing 1="1=0.10000, 10=0.01400, 100=0.00580, 1000=0.00262, 2500=0.00228, 5000=0.00188 (USD)", RoHS=Yes, RoHS Compliant=Yes, Series=RC, Stock 1=662020, Supplier 1=Digi-Key, Termination=SMD/SMT, Tolerance=1%, Voltage Rating (DC)=50V, Width=0.02inch
R8: library part RC0402FR-0756KL, "RES SMD 56K OHM 1% 1/16W 0402", Case Code (Imperial)=0402, Case Code (Metric)=1005, Manufacturer=Yageo, Max Operating Temperature=155°C, Max Power Dissipation=63mW, Min Operating Temperature=-55°C, Package Quantity=1, Power Rating=62.5mW, Resistance=56kR, Resistance Tolerance=1%, Resistor Type="Thick Film", Supplier Part Number 1=311-56.0KLRCT-ND, Temperature Coefficient=100ppm/°C, Voltage Rating=50V, Case/Package=0402, Category="Chip SMD Resistors", ComponentLink1Description=https://datasheet.ciiva.com/46412/1018594-46412840.pdf?src-supplier=Element14, ComponentLink1URL=https://datasheet.ciiva.com/46412/1018594-46412840.pdf?src-supplier=Element14, ComponentLink2Description=https://datasheet.ciiva.com/2453/pyu-r-int-thick-7-2453479.pdf?src-supplier=Digi-Key, ComponentLink2URL=https://datasheet.ciiva.com/2453/pyu-r-int-thick-7-2453479.pdf?src-supplier=Digi-Key, ComponentLink3Description=https://datasheet.ciiva.com/2453/pyu-r-int-thick-7-2453480.pdf?src-supplier=Digi-Key, ComponentLink3URL=https://datasheet.ciiva.com/2453/pyu-r-int-thick-7-2453480.pdf?src-supplier=Digi-Key, ComponentLink4Description=https://datasheet.ciiva.com/2453/pyu-r-int-thick-7-2453478.pdf?src-supplier=Digi-Key, ComponentLink4URL=https://datasheet.ciiva.com/2453/pyu-r-int-thick-7-2453478.pdf?src-supplier=Digi-Key, ComponentLink5Description=https://datasheet.ciiva.com/5558/pyu-rc0402-51-rohs-l-6-r-5558279.pdf?src-supplier=Mouser, ComponentLink5URL=https://datasheet.ciiva.com/5558/pyu-rc0402-51-rohs-l-6-r-5558279.pdf?src-supplier=Mouser, ComponentLink6Description=https://datasheet.ciiva.com/7850/1018594-7850045.pdf?src-supplier=Element14, ComponentLink6URL=https://datasheet.ciiva.com/7850/1018594-7850045.pdf?src-supplier=Element14, ComponentLink7Description=https://datasheet.ciiva.com/7850/1018594-7850044.pdf?src-supplier=Element14, ComponentLink7URL=https://datasheet.ciiva.com/7850/1018594-7850044.pdf?src-supplier=Element14, Construction=Rectangular, Depth=0.5mm, Features="Moisture Resistant", Height=0.016inch, Lead Free="Lead Free", Length=1mm, Manufacturer Part Number=RC0402FR-0756KL, Military Standard=Not, Number of Terminations=2, Packaging="Tape and Reel", Pricing 1="1=0.10000, 10=0.01600, 100=0.00660, 1000=0.00299, 2500=0.00259, 5000=0.00214 (USD)", REACH SVHC="No SVHC", RoHS=Yes, RoHS Compliant=Yes, Series=RC, Stock 1=724545, Supplier 1=Digi-Key, Technology="THICK FILM", Termination=SMD/SMT, Tolerance=1%, Width=0.02inch, Working Voltage=50V
R12: library part RC0402FR-07510RL, "RES SMD 510 OHM 1% 1/16W 0402", Case Code (Imperial)=0402, Case Code (Metric)=1005, Manufacturer=Yageo, Max Operating Temperature=155°C, Max Power Dissipation=63mW, Min Operating Temperature=-55°C, Package Quantity=1, Supplier Part Number 1=311-510LRCT-ND, Temperature Coefficient=100ppm/°C, Tolerance=1%, Voltage Rating=50V, Case/Package=0402, Category 1=Resistors, Category 2="Chip Resistor - Surface Mount", ComponentLink1Description=https://datasheet.ciiva.com/17063/pyu-rc0402-51-rohs-l-6-r-17063430.pdf?src-supplier=Future+Electronics, ComponentLink1URL=https://datasheet.ciiva.com/17063/pyu-rc0402-51-rohs-l-6-r-17063430.pdf?src-supplier=Future+Electronics, ComponentLink2Description=https://datasheet.ciiva.com/2453/pyu-r-int-thick-7-2453397.pdf?src-supplier=Digi-Key, ComponentLink2URL=https://datasheet.ciiva.com/2453/pyu-r-int-thick-7-2453397.pdf?src-supplier=Digi-Key, ComponentLink3Description=https://datasheet.ciiva.com/2453/pyu-r-int-thick-7-2453398.pdf?src-supplier=Digi-Key, ComponentLink3URL=https://datasheet.ciiva.com/2453/pyu-r-int-thick-7-2453398.pdf?src-supplier=Digi-Key, ComponentLink4Description=https://datasheet.ciiva.com/2453/pyu-r-int-thick-7-2453399.pdf?src-supplier=Digi-Key, ComponentLink4URL=https://datasheet.ciiva.com/2453/pyu-r-int-thick-7-2453399.pdf?src-supplier=Digi-Key, Composition="Thick Film", Depth=0.5mm, Features="Moisture Resistant", Height=0.016inch, Lead Free="Lead Free", Length=1mm, Manufacturer 1=Yageo, Manufacturer Part Number=RC0402FR-07510RL, Manufacturer Part Number 1=RC0402FR-07510RL, Military Standard=Not, Mount="Surface Mount", Number of Terminations=2, Packaging="Tape and Reel", Power Rating=63mW, Pricing 1="1=0.10000, 10=0.01600, 100=0.00640, 1000=0.00289, 2500=0.00251, 5000=0.00207 (USD)", REACH SVHC=Unknown, Resistance=510R, RoHS=Yes, Stock 1=458379, Supplier 1=Digi-Key, Termination=SMD/SMT, Voltage Rating (DC)=50V, Weight=2.3E-05oz, Width=0.5mm
SW1 SW2: "SWITCH TACTILE SPST-NO 0.05A 16V", Case/Package=SMD/SMT, Color=Black, Current Rating=50mA, Manufacturer="ITT C&K", Max Operating Temperature=85°C, Min Operating Temperature=-40°C, Operating Force=160gf, Package Quantity=2900, Supplier Part Number 1=CKN10502CT-ND, Voltage Rating (DC)=16V, Actuator Type=Standard, Category="Tactile Switches", ComponentLink1Description=https://datasheet.ciiva.com/24082/pts810-4mar13-248115-24082262.pdf?src-supplier=Mouser, ComponentLink1URL=https://datasheet.ciiva.com/24082/pts810-4mar13-248115-24082262.pdf?src-supplier=Mouser, ComponentLink2Description=https://datasheet.ciiva.com/18514/pts810-4mar13-18514059.pdf?src-supplier=Digi-Key, ComponentLink2URL=https://datasheet.ciiva.com/18514/pts810-4mar13-18514059.pdf?src-supplier=Digi-Key, ComponentLink3Description=https://datasheet.ciiva.com/18514/pts810-4mar13-18514060.pdf?src-supplier=Digi-Key, ComponentLink3URL=https://datasheet.ciiva.com/18514/pts810-4mar13-18514060.pdf?src-supplier=Digi-Key, ComponentLink4Description=https://datasheet.ciiva.com/18514/pts810-4mar13-18514058.pdf?src-supplier=Digi-Key, ComponentLink4URL=https://datasheet.ciiva.com/18514/pts810-4mar13-18514058.pdf?src-supplier=Digi-Key, Contact Plating=Silver, Depth=4.6mm, Illumination Type=Non-Illuminated, Lead Free="Lead Free", Length=3.2mm, Manufacturer Part Number=PTS810SJM250SMTRLFS, Max Current Rating=50mA, Mechanical Life=150000Cycles, Mount="Surface Mount", Orientation=Straight, Packaging="Tape and Reel", Pricing 1="1=0.36000, 10=0.34400, 25=0.32440, 100=0.28150, 250=0.25536, 500=0.23754, 1000=0.21379 (USD)", RoHS=Yes, RoHS Compliant=Yes, Stock 1=536224, Supplier 1=Digi-Key, Switch Function=Off-Mom, Switch Travel=0.15mm, Termination=J-Bend, Throw Configuration=SPST
U1: "IC 1-A LI-ION IC PROGRAMMABLE CHARG", Manufacturer="Texas Instruments", Supplier Part Number 1=296-BQ25180YBGRCT-ND, ComponentLink1Description=https://www.ti.com/lit/ds/symlink/bq25180.pdf?ts=1664107697804&ref_url=https%253A%252F%252Fwww.ti.com%252Fproduct%252FBQ25180, ComponentLink1URL=https://www.ti.com/lit/ds/symlink/bq25180.pdf?ts=1664107697804&ref_url=https%253A%252F%252Fwww.ti.com%252Fproduct%252FBQ25180, Manufacturer Part Number=BQ25180YBGR, Pricing 1="1=2.78000, 10=2.50000, 25=2.35840, 100=2.00940, 250=1.88680, 500=1.65096, 1000=1.42400 (USD)", RoHS=No, Stock 1=5326, Supplier 1=Digi-Key
U2: "IC SWITCH QUAD SPST 14DHVQFN", Manufacturer=Nexperia, Supplier Part Number 1=1727-3499-1-ND, Category="Decoders and Multiplexers", ComponentLink1Description=https://assets.nexperia.com/documents/data-sheet/74LVC4066.pdf?src-supplier=Digi-Key, ComponentLink1URL=https://assets.nexperia.com/documents/data-sheet/74LVC4066.pdf?src-supplier=Digi-Key, Manufacturer Part Number=74LVC4066BQ,115, Pricing 1="1=0.67000, 10=0.59300, 25=0.55720, 100=0.45480, 250=0.42248, 500=0.35956, 1000=0.28764 (USD)", RoHS=Yes, RoHS Compliant=Yes, Stock 1=53790, Supplier 1=Digi-Key
U3: "IC REG LINEAR 3.3V 700MA 4XDFN", Manufacturer="ON Semiconductor", Supplier Part Number 1=NCP167BMX330TBGOSCT-ND, Category="Voltage Regulators - Linear", ComponentLink1Description=http://www.farnell.com/datasheets/2711391.pdf?src-supplier=Farnell, ComponentLink1URL=http://www.farnell.com/datasheets/2711391.pdf?src-supplier=Farnell, ComponentLink2Description=https://www.onsemi.com/pub/Collateral/NCP167-D.PDF?src-supplier=Digi-Key, ComponentLink2URL=https://www.onsemi.com/pub/Collateral/NCP167-D.PDF?src-supplier=Digi-Key, ComponentLink3Description=http://www.farnell.com/datasheets/2711391.pdf?src-supplier=Newark, ComponentLink3URL=http://www.farnell.com/datasheets/2711391.pdf?src-supplier=Newark, Manufacturer Part Number=NCP167BMX330TBG, Pricing 1="1=0.61000, 10=0.52500, 25=0.49000, 100=0.39210, 250=0.36408, 500=0.30806, 1000=0.23804 (USD)", RoHS=Yes, RoHS Compliant=Yes, Stock 1=222045, Supplier 1=Digi-Key
U4: "IC MCU 32BIT 512KB FLSH 48UFQFPN", Manufacturer=STMicroelectronics, Supplier Part Number 1=STM32G473CEU6-ND, Category=Microcontrollers, Manufacturer Part Number=STM32G473CEU6, Pricing 1="1=11.14000, 10=10.06100, 25=9.59360, 80=8.32988, 230=7.95552, 440=7.25359, 1560=6.38145 (USD)", RoHS=Yes, Stock 1=305, Supplier 1=Digi-Key
U5: "IC FLASH 16MBIT SPI/QUAD 8USON", Frequency=33MHz, Manufacturer=Macronix, Max Operating Temperature=85°C, Min Operating Temperature=-40°C, Supplier Part Number 1=1092-1204-2-ND, Category=Memory, ComponentLink1Description=http://ckassoc.com/oldsite/pdf/Macronix_Product_Line_Card_July_2017_General%20_070617.pdf?src-supplier=Digi-Key, ComponentLink1URL=http://ckassoc.com/oldsite/pdf/Macronix_Product_Line_Card_July_2017_General%20_070617.pdf?src-supplier=Digi-Key, Lead Free="Lead Free", Manufacturer Part Number=MX25R1635FZUIL0, Memory Size=16Mb, Memory Type=Non-Volatile,FLASH, Mount="Surface Mount", Packaging="Tape and Reel", Pricing 1="12000=0.58880 (USD)", RoHS=Yes, RoHS Compliant=Yes, Stock 1=217224, Supplier 1=Digi-Key
X1: library part Q22FA1280002500, "CRYSTAL 32.0000MHZ 8PF SMD", Manufacturer=Seiko, Supplier Part Number 1=C187794, Manufacturer Part Number=Q22FA1280002500, Pricing 1="5=0.17610, 50=0.14280, 150=0.12660, 500=0.11100, 3000=0.10720, 6000=0.10480 (USD)", RoHS=No, Stock 1=25980, Supplier 1=LCSC

## Via types
v1: diameter 0.4, hole 0.2, L1 to L4, tented both sides, 180 vias

## Nets (pads, with @x,y where several pads share a name; then routed paths per layer and width w, separated by ;. In a path a pad name is that pad's centre, name@x,y a point inside that pad or via, vN(x,y) a via of type N, cw(c..) or ccw(c..) an arc to the next point about the centre after c; other vN are vias at no path point)
+3V3: C6.2 C7.2 C8.2 C13.2 C14.2 C15.2 C16.2 C17.2 C18.2 J2.1 R9.2 R10.2 R11.2 R12.2 R13.1 R14.2 SW1.3 SW1.4 SW2.3 SW2.4 U2.14 U3.1 U4.1 U4.20 U4.21 U4.23 U4.35 U4.48 U5.8 | length 82.4
  L1 w0.18: C6.2@19.175,9.1 19.285,9.21 19.596,9.21 19.736,9.35 U3.1@19.995,9.35
  L1 w0.25: U5.8@10.475,8.35 11.17,8.35 11.37,8.55 C8.2@12.2,8.55 ; C8.2@12.35,8.55 C8.2@12.2,8.55 ; U4.21@12.8,9.675 U4.20@12.3,9.675 12.3,8.65 C8.2@12.2,8.55 ; 13.8,8.55 U4.23@13.8,9.675 ; U2.14@20.25,16.05 v1(21.35,16.05)
  L1 w0.3: v1(8,16.9) 8,16.873 8.175,16.698 8.175,16.45 ; U4.1@8.175,15.8 8.175,16.45 ; C15.2@8.625,17.975 8.625,17.75 8.625,16.55 8.5,16.425 ; U4.48@8.8,16.425 8.5,16.425 ; U4.35@14.925,15.3 16.05,15.3 C13.2@16.075,15.275 ; 8.175,16.45 8.2,16.425 8.5,16.425
  L1 w0.4: SW1.4@0.825,5.85 3.25,5.85 ; SW2.3@0.825,15.725 3.25,15.725 ; v1(4.975,15.725) 3.25,15.725 ; C16.2@7.025,17.05 7.85,17.05 v1(8,16.9) ; R10.2@7.325,4.575 6.429,4.576 6.4,4.576 6.375,4.601 R14.2@6.375,5.425 ; 8.575,6.1 6.634,6.1 6.4,5.866 6.4,5.45 R14.2@6.375,5.425 ; 10.325,5.375 13.375,5.375 14.087,6.087 15.337,6.087 15.825,6.575 15.825,7.775 16.325,8.275 16.5,8.45 ; C8.2@12.35,8.55 13.8,8.55 C17.2@14.15,8.55 C14.2@15.05,8.55 16.25,8.55 ; C13.2@16.075,15.275 16.125,15.275 16.125,15.176 v1(16.46,14.841) ; R13.1@17.325,8.45 16.5,8.45 ; C6.2@19.175,9.1 v1(18.725,9.1) C7.2@18.275,9.1 v1(18.275,9.525) 17.575,9.525 16.6,8.55 ; R12.2@27,17.45 27.025,17.475 27.45,17.475 27.7,17.725 J2.1@27.7,19.685 ; 3.25,5.85 3.25,15.725 ; 3.25,5.85 4.875,5.85 4.962,5.763 5.662,5.763 5.95,5.475 6.35,5.475 6.375,5.45 R14.2@6.375,5.425 ; 16.25,8.55 16.6,8.55 ; 16.25,8.55 16.35,8.45 16.5,8.45 ; 16.5,8.45 16.6,8.55
  L4 w0.4: v1(4.15,15.725) 5.075,15.725 6.4,17.05 7.85,17.05 v1(8,16.9) ; v1(16.46,14.841) 16.673,14.841 18.944,12.569 18.944,9.319 v1(18.725,9.1) 18.3,9.525 v1(18.275,9.525) ; 18.944,12.544 21.35,14.95 v1(21.35,16.05) 21.35,17.575 22.075,18.3 26.315,18.3 J2.1@27.7,19.685
  other v1: 7.25,17.05
+VBAT: C3.2 J3.4 Q1.4 R3.2 U1.C2 | length 6
  L1 w0.2: Q1.4@17.5,3.625 R3.2@18.35,3.625 ; 19.7,3.575 19.725,3.6 ; U1.C2@19.725,5.525 19.725,3.6 ; J3.4@20.08,1.905 20.08,2.297 19.725,2.652 19.725,3.6 ; C3.2@21.025,3.625 19.75,3.625 19.725,3.6
+VBUS: D1.2 J1.A4 J1.A9 J1.B4 J1.B9 | length 9.4
  L1 w0.2: J1.A4@23.094,9.681 23.147,9.628 23.769,9.628 23.924,9.473 24.342,9.473 24.394,9.421 25.409,9.421 26.144,8.686 26.144,6.921 26.65,6.415 26.65,4.83 D1.2@26.944,4.536